# Allegro board single20210120.brd
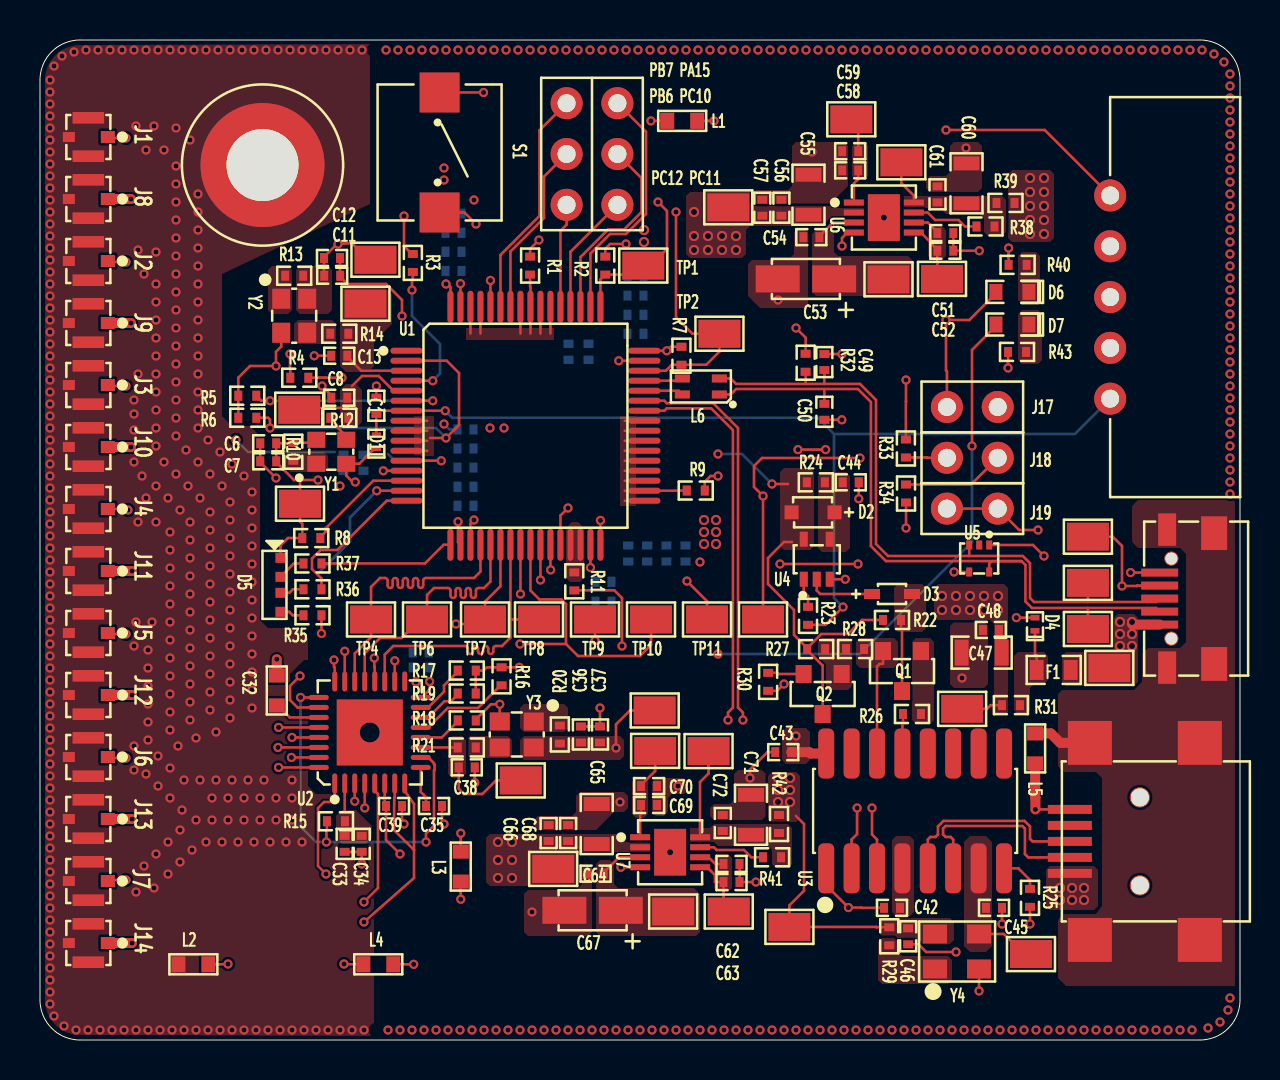
[diagram p0: board, top side]
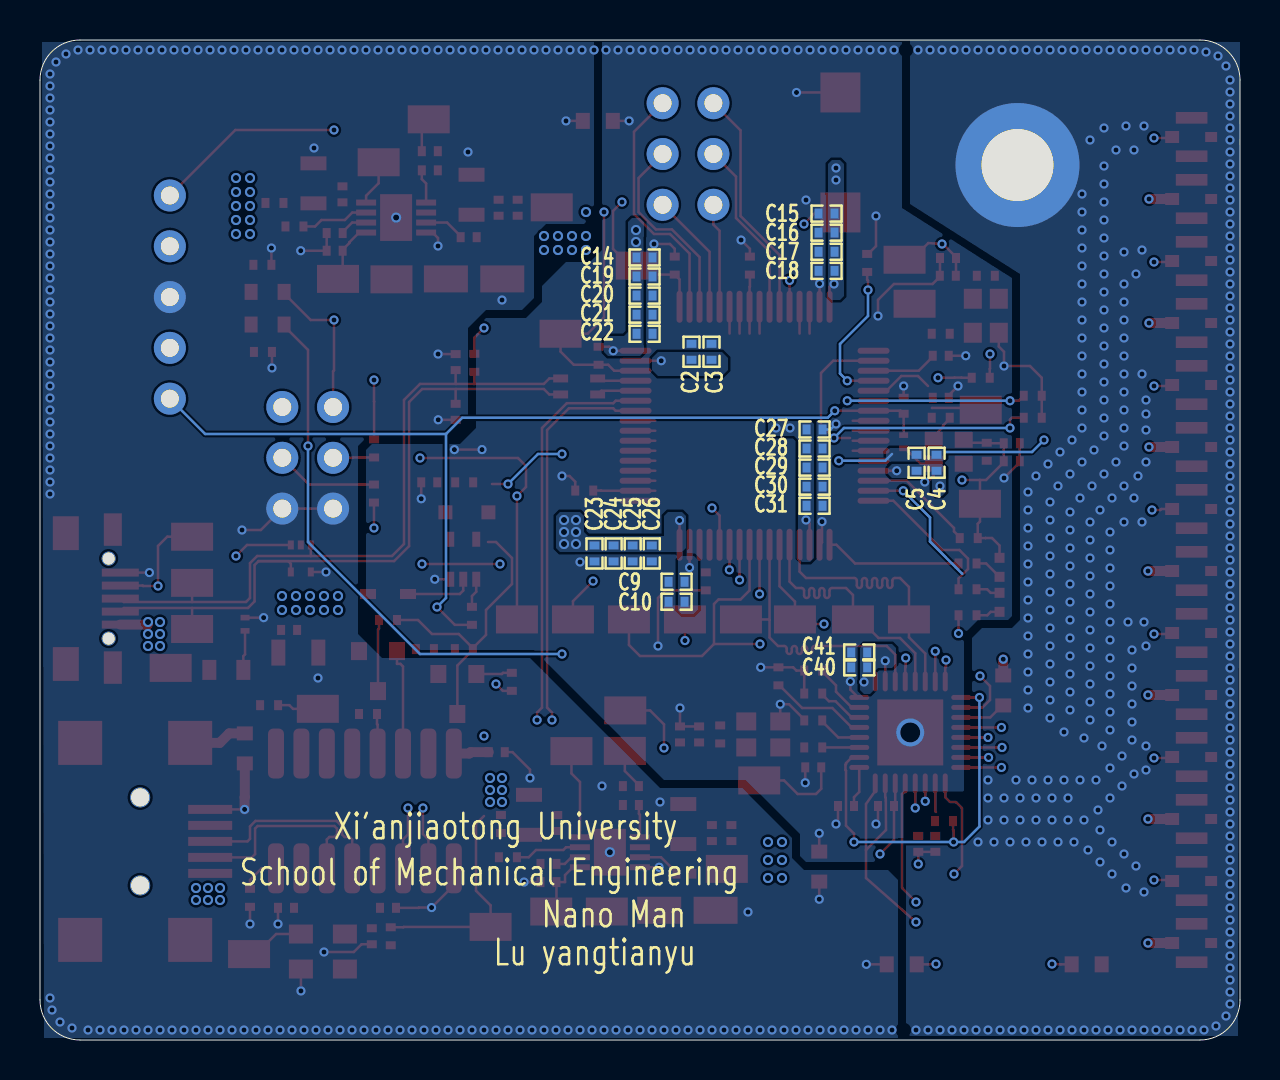
[diagram p1: board, bottom side, seen from below]

Outline 60 x 50 mm; copper layers: TOP, GND, POWER, BOTTOM. Coordinates in mm from the lower left corner of the outline.
Outline path: 0,48 arc(0.59,49.41) 2,50 58,50 arc(59.41,49.41) 60,48 60,2 arc(59.41,0.59) 58,0 2,0 arc(0.59,0.59) 0,2 0,48

## Design rules (mm)
constraint set DEFAULT: min track width 0.127
net group DP1: nets N1282544 N1282560
net group DP2: nets RX TX
net group DP_USB: nets USB_DM USB_DP
nets with their own width: min track width 0.127; nets 5V 5V_USB AGND PC1 PC2 PC3 PC4 PC5 PC6 PC7

## Placement (name value [footprint] x y rotation side)
C1  1uF  [C0402]  16.82 31.71 270 top
C2  2.2uF  [C0402]  27.43 34.41 270 bottom
C3  2.2uF  [C0402]  26.43 34.41 270 bottom
C4  1uF  [C0402]  15.17 28.86 270 bottom
C5  100nF  [C0402]  16.17 28.86 270 bottom
C6  10nF  [C0402]  11.41 29.84 180 top
C7  1uF  [C0402]  11.41 28.94 180 top
C8  10pF  [C0402]  14.96 32.11 0 top
C9  2.2uF  [C0402]  28.17 22.91 0 bottom
C10  2.2uF  [C0402]  28.17 21.91 0 bottom
C11  10nF  [C0402]  14.61 38.21 0 top
C12  1uF  [C0402]  14.6 39.1 0 top
C13  10pF  [C0402]  14.96 34.21 0 top
C14  4.7uF  [C0402]  29.77 39.13 0 bottom
C15  1uF  [C0402]  20.67 41.32 180 bottom
C16  100nF  [C0402]  20.67 40.37 180 bottom
C17  100nF  [C0402]  20.67 39.41 180 bottom
C18  100nF  [C0402]  20.67 38.46 180 bottom
C19  100nF  [C0402]  29.77 38.17 0 bottom
C20  100nF  [C0402]  29.77 37.22 0 bottom
C21  100nF  [C0402]  29.77 36.27 0 bottom
C22  100nF  [C0402]  29.77 35.31 0 bottom
C23  100nF  [C0402]  32.27 24.33 90 bottom
C24  100nF  [C0402]  31.32 24.33 90 bottom
C25  100nF  [C0402]  30.37 24.33 90 bottom
C26  100nF  [C0402]  29.41 24.33 90 bottom
C27  100nF  [C0402]  21.27 30.53 0 bottom
C28  100nF  [C0402]  21.27 29.57 0 bottom
C29  100nF  [C0402]  21.27 28.62 0 bottom
C30  100nF  [C0402]  21.27 27.67 0 bottom
C31  10pF  [C0402]  21.27 26.71 0 bottom
C32  22pF  [C0603]  11.84 17.48 90 top
C33  4.7uF  [C0402]  15.23 9.81 270 top
C34  4.7uF  [C0402]  16.09 9.81 270 top
C35  100nF  [C0402]  19.7 11.7 180 top
C36  10nF  [C0402]  27.05 15.28 90 top
C37  1uF  [C0402]  28 15.28 90 top
C38  10pF  [C0402]  21.34 13.63 180 top
C39  10uF  [C0402]  17.7 11.7 180 top
C40  10uF  [C0402]  19.04 18.63 180 bottom
C41  100pF  [C0402]  19.04 19.38 180 bottom
C42  100nF  [C0402]  42.6 6.61 180 top
C43  100nF  [C0402]  37.16 14.39 0 top
C44  10uF  [C0402]  40.54 27.88 180 top
C45  15pF  [C0402]  47.7 6.61 180 top
C46  100nF  [C0402]  43.41 5.19 270 top
C47  47uF  [C0805]  47.08 19.37 180 top
C48  100nF  [C0402]  47.55 20.5 180 top
C49  10pF  [C0402]  39.22 33.9 270 top
C50  10pF  [C0402]  39.22 31.41 90 top
C51  2.2uF  [C0402]  45.27 40.35 0 top
C52  2.2uF  [C0402]  45.27 39.46 0 top
C53  47uF  [C3216-18]  38.3 38.05 180 top
C54  1uF  [C0402]  38.57 40.14 180 top
C55  47uF  [C0805]  38.42 42.26 90 top
C56  10uF  [C0402]  37.07 41.61 90 top
C57  10nF  [C0402]  36.12 41.61 90 top
C58  2.2uF  [C0402]  40.51 43.48 0 top
C59  10uF  [C0402]  40.51 44.44 0 top
C60  47uF  [C0805]  46.33 42.83 270 top
C61  100nF  [C0402]  44.88 42.28 270 top
C62  2.2uF  [C0402]  34.58 8.8 0 top
C63  2.2uF  [C0402]  34.58 7.9 0 top
C64  1uF  [C0402]  27.78 8.32 180 top
C65  47uF  [C0805]  27.84 10.8 90 top
C66  10nF  [C0402]  25.43 10.35 90 top
C67  47uF  [C3216-18]  27.63 6.49 180 top
C68  10uF  [C0402]  26.41 10.35 90 top
C69  2.2uF  [C0402]  30.45 11.75 180 top
C70  10uF  [C0402]  30.45 12.7 180 top
C71  47uF  [C0805]  35.55 11.26 270 top
C72  100nF  [C0402]  34.14 10.85 270 top
D1  ESD101-B1-02EL  [D0402]  16.82 29.91 90 top
D2  1N4148WS  [SOD_323]  38.65 26.38 180 top
D3  RB521S30  [SOD_523F]  42.6 22.3 0 top
D4  ESD101-B1-02EL  [D0402]  49.75 20.79 90 top
D5  LED_RGB  [LED_RGB_1204]  11.72 22.76 270 top
D6  LED  [D0603]  48.62 37.4 180 top
D7  LED  [D0603]  48.62 35.77 180 top
F1  ASMD0603-050  [F0603]  50.68 18.5 180 top
H1  Hole  [M23R6_6R2]  11.13 43.75 0 top
J1  -  [IPEX4]  2.42 45.15 180 top
J2  -  [IPEX4]  2.42 38.95 180 top
J3  -  [IPEX4]  2.42 32.75 180 top
J4  -  [IPEX4]  2.42 26.55 180 top
J5  -  [IPEX4]  2.42 20.35 180 top
J6  -  [IPEX4]  2.42 14.15 180 top
J7  -  [IPEX4]  2.42 7.95 180 top
J8  -  [IPEX4]  2.42 42.05 180 top
J9  -  [IPEX4]  2.42 35.85 180 top
J10  -  [IPEX4]  2.42 29.65 180 top
J11  -  [IPEX4]  2.42 23.45 180 top
J12  -  [IPEX4]  2.42 17.25 180 top
J13  -  [IPEX4]  2.42 11.05 180 top
J14  -  [IPEX4]  2.42 4.85 180 top
J15  USB_MINI  [MINI_USB]  52.49 9.93 90 top
J16  USB_Micro  [MICRO_USB]  56.81 22.07 90 top
J17  B2S_1  [2P2R54]  46.62 31.65 0 top
J18  B2S_1  [2P2R54]  46.62 29.11 0 top
J19  B2S_1  [2P2R54]  46.62 26.57 0 top
J20  SIP2P54-5P-R  [5P2R54]  53.51 37.15 90 top
J21  -  [3P2R54_2]  27.6 44.3 270 top
L1  0@100MHz  [L0603]  32.11 45.96 0 top
L2  0@100MHz  [L0603]  7.67 3.78 180 top
L3  0@100MHz  [L0603]  21.04 8.67 270 top
L4  0@100MHz  [L0603]  16.91 3.78 180 top
L5  330@100MHz  [L0603]  49.76 14.58 270 top
L6  ACM2012-900  [L2012-2P]  33.04 32.68 180 top
Q1  SS8050  [SOT_23]  43.1 19.45 0 top
Q2  SS8550  [SOT_23]  39.13 18.3 0 top
R1  10k  [R0402]  24.51 38.72 270 top
R2  10k  [R0402]  28.26 38.72 270 top
R3  10k  [R0402]  18.64 38.85 270 top
R4  1k  [R0402]  12.96 33.11 0 top
R5  10k  [R0402]  10.36 32.21 0 top
R6  10k  [R0402]  10.36 31.11 0 top
R7  10k  [R0402]  32.07 34.21 270 top
R8  4.7k  [R0402]  13.56 25.1 0 top
R9  10k  [R0402]  32.79 27.47 180 top
R10  4.7k  [R0402]  12.66 29.41 270 top
R11  10k  [R0402]  26.71 22.93 90 top
R12  10R  [R0402]  14.96 31.11 180 top
R13  4.7k  [R0402]  12.71 38.21 180 top
R14  10R  [R0402]  14.96 35.31 180 top
R15  0R  [R0402]  14.8 10.94 0 top
R16  10k  [R0402]  23.08 18.18 90 top
R17  10k  [R0402]  21.34 18.47 0 top
R18  10k  [R0402]  21.34 15.98 0 top
R19  10k  [R0402]  21.34 17.32 0 top
R20  4.7k  [R0402]  25.99 15.28 90 top
R21  10R  [R0402]  21.34 14.63 0 top
R22  10k  [R0402]  42.6 21 180 top
R23  0R  [R0402]  38.4 21.21 270 top
R24  1M  [R0402]  38.79 27.88 0 top
R25  10k  [R0402]  49.5 7.11 90 top
R26  2.7k  [R0402]  43.6 16.3 0 top
R27  10k  [R0402]  38.81 19.55 0 top
R28  47k  [R0402]  40.75 19.55 180 top
R29  4.7k  [R0402]  42.46 5.19 270 top
R30  1k  [R0402]  36.41 17.91 270 top
R31  10R  [R0402]  48.55 16.74 180 top
R32  4.7k  [R0402]  38.28 33.86 270 top
R33  10k  [R0402]  43.3 29.58 270 top
R34  10k  [R0402]  43.3 27.32 270 top
R35  470  [R0402]  13.62 21.24 0 top
R36  330  [R0402]  13.62 22.54 0 top
R37  100  [R0402]  13.62 23.83 0 top
R38  10k  [R0402]  47.28 40.68 180 top
R39  100R  [R0402]  48.28 41.85 180 top
R40  4.7k  [R0402]  48.88 38.76 0 top
R41  10k  [R0402]  36.6 9.14 180 top
R42  100R  [R0402]  36.95 10.8 270 top
R43  4.7k  [R0402]  48.85 34.4 0 top
S1  TOUCH SWITCH  [6_6_5]  19.98 44.38 270 top
TP1  TEST POINT  [TP0805]  30.16 38.72 0 top
TP2  TEST POINT  [TP0805]  33.97 35.31 0 top
TP3  TEST POINT  [TP0805]  13 26.81 180 top
TP4  TEST POINT  [TP0805]  16.55 21.03 180 top
TP5  TEST POINT  [TP0805]  12.96 31.51 0 top
TP6  TEST POINT  [TP0805]  19.35 21.03 180 top
TP7  TEST POINT  [TP0805]  22.25 21.03 180 top
TP8  TEST POINT  [TP0805]  24.95 21.03 180 top
TP9  TEST POINT  [TP0805]  27.75 21.03 180 top
TP10  TEST POINT  [TP0805]  30.55 21.03 180 top
TP11  TEST POINT  [TP0805]  33.35 21.03 180 top
TP12  TEST POINT  [TP0805]  36.15 21.03 180 top
TP13  TEST POINT  [TP0805]  16.77 39.01 0 top
TP14  TEST POINT  [TP0805]  16.27 36.81 0 top
TP15  TEST POINT  [TP0805]  30.74 16.48 180 top
TP16  TEST POINT  [TP0805]  24.04 12.98 0 top
TP17  TEST POINT  [TP0805]  49.55 4.3 180 top
TP18  TEST POINT  [TP0805]  37.47 5.65 180 top
TP19  TEST POINT  [TP0805]  53.47 18.6 180 top
TP20  TEST POINT  [TP0805]  46.11 16.56 180 top
TP21  TEST POINT  [TP0805]  52.4 20.55 180 top
TP22  TEST POINT  [TP0805]  52.4 22.86 180 top
TP23  TEST POINT  [TP0805]  52.4 25.16 0 top
TP24  TEST POINT  [TP0805]  45.1 38.05 0 top
TP25  TEST POINT  [TP0805]  42.43 38.03 0 top
TP26  TEST POINT  [TP0805]  40.56 46.03 0 top
TP27  TEST POINT  [TP0805]  34.41 41.63 0 top
TP28  TEST POINT  [TP0805]  43.07 43.89 0 top
TP29  TEST POINT  [TP0805]  34.44 6.42 0 top
TP30  TEST POINT  [TP0805]  31.66 6.42 0 top
TP31  TEST POINT  [TP0805]  25.66 8.55 180 top
TP32  TEST POINT  [TP0805]  30.76 14.45 0 top
TP33  TEST POINT  [TP0805]  33.43 14.45 0 top
U1  STM32F405RGT6  [LQFP_64]  24.27 30.71 270 top
U2  PCAP02AE  [QFN_32]  16.49 15.38 0 top
U3  CH340G  [SOP_16]  43.76 11.45 0 top
U4  74HC1G66GW  [SOT_353]  38.84 24.04 0 top
U5  TPD2E001  [SOT_5]  46.96 24.08 180 top
U6  ADM7154-3V3  [LFCSP_8]  42.19 41.12 0 top
U7  ADM7154-3V  [LFCSP_8]  31.51 9.39 0 top
Y1  OSC-8M  [Y2016]  14.56 29.41 0 top
Y2  OSC-32K  [Y2520]  12.71 36.21 270 top
Y3  OSC-4M  [Y2520]  23.84 15.28 180 top
Y4  OSC-12M  [Y3225]  45.85 4.42 0 top

## Library data of the parts
C1-C52 C54-C66 C68-C72 = C NP
C53 C67 = C_T
D1 D4 = ESD101B102ELSE6327XTSA1
D2 = DIODE
D3 = DIODE_SCHTKY_0
D5 = LED_RGB
D6 D7 = LED
F1 = F0603C0R25FWTR
H1 = Hole
J1-J14 = IPEX4
J15 J16 = USB_MINI_AB_RECEPTACLE_1
J17-J19 = B2S_1
J20 = SIP5_2_1
J21 = 3P2R54_2
L1-L5 = INDUCTOR_FERRITE
L6 = Common Mode Choke_ACM2012-900
Q1 = NPN
Q2 = PNP BCE_0
R1-R43 = R
S1 = Touch Switch
TP1-TP33 = TEST POINT
U1 = STM32F405RGT6
U2 = PCAP02AE
U3 = MAX3232EEAE_1
U4 = 74LVC1G125_0
U5 = ESD_TPD2E001
U6 = LDO_ADM7154-3V3
U7 = LDO_ADM7154-3V0
Y1 Y4 = OSC_8M
Y2 Y3 = OSC_32K

## Footprints (pads in the part's own frame, mm; a bottom-side part is the same pattern mirrored in y, then rotated)
2P2R54
  round 1.6 hole 0.9: 1(-1.27,0) 2(1.27,0)
3P2R54_2
  round 1.6 hole 0.9: 1(-2.54,1.27) 2(0,1.27) 3(2.54,1.27) 4(2.54,-1.27) 5(0,-1.27) 6(-2.54,-1.27)
5P2R54
  round 1.6 hole 0.9: 1(-5.08,0) 2(-2.54,0) 3(0,0) 4(2.54,0) 5(5.08,0)
6_6_5
  rect 2x2 smd: 1(-3,0) 2(3,0)
C0402
  rect 0.4x0.5 smd: 1(-0.4,0) 2(0.4,0)
C0603
  rect 0.7x0.8 smd: 1(-0.75,0) 2(0.75,0)
C0805
  rect 0.7x1.3 smd: 1(-1,0) 2(1,0)
C3216-18
  rect 2.2x1.35 smd: 1(-1.41,0) 2(1.41,0)
D0402
  rect 0.28x0.45 smd: 1(-0.33,0) 2(0.33,0)
D0603
  rect 0.65x0.8 smd: 1(-0.825,0) 2(0.825,0)
F0603
  rect 0.7x1 smd: 1(-0.85,0) 2(0.85,0)
IPEX4
  rect 0.7x0.6 smd: 1(-0.975,0)
  rect 1.58x0.58 smd: 2(0,-0.96) 4(0,0.96)
  rect 0.6x0.5 smd: 3(0.975,0)
L0603
  rect 0.7x0.8 smd: 1(-0.75,0) 2(0.75,0)
L2012-2P
  rect 0.75x0.4 smd: 1(-0.925,0.4) 2(-0.925,-0.4) 3(0.925,-0.4) 4(0.925,0.4)
LED_RGB_1204
  rect 0.5x0.5 smd: 1(-0.4,0.3) 2(0.4,0.3) 3(-1.35,0.3) 4(1.35,0.3)
LFCSP_8
  rect 1x0.3 smd: 1(-1.5,0.75) 2(-1.5,0.25) 3(-1.5,-0.25) 4(-1.5,-0.75) 5(1.5,-0.75) 6(1.5,-0.25) 7(1.5,0.25) 8(1.5,0.75)
  rect 1.6x2.34 smd: 9(0,0)
LQFP_64
  oval 0.3x1.6 smd: 1(-3.75,-5.95) 2(-3.25,-5.95) 3(-2.75,-5.95) 4(-2.25,-5.95) 5(-1.75,-5.95) 6(-1.25,-5.95) 7(-0.75,-5.95) 8(-0.25,-5.95) 9(0.25,-5.95) 10(0.75,-5.95) 11(1.25,-5.95) 12(1.75,-5.95) 13(2.25,-5.95) 14(2.75,-5.95) 15(3.25,-5.95) 16(3.75,-5.95) 33(3.75,5.95) 34(3.25,5.95) 35(2.75,5.95) 36(2.25,5.95) 37(1.75,5.95) 38(1.25,5.95) 39(0.75,5.95) 40(0.25,5.95) 41(-0.25,5.95) 42(-0.75,5.95) 43(-1.25,5.95) 44(-1.75,5.95) 45(-2.25,5.95) 46(-2.75,5.95) 47(-3.25,5.95) 48(-3.75,5.95)
  oval 1.6x0.3 smd: 17(5.95,-3.75) 18(5.95,-3.25) 19(5.95,-2.75) 20(5.95,-2.25) 21(5.95,-1.75) 22(5.95,-1.25) 23(5.95,-0.75) 24(5.95,-0.25) 25(5.95,0.25) 26(5.95,0.75) 27(5.95,1.25) 28(5.95,1.75) 29(5.95,2.25) 30(5.95,2.75) 31(5.95,3.25) 32(5.95,3.75) 49(-5.95,3.75) 50(-5.95,3.25) 51(-5.95,2.75) 52(-5.95,2.25) 53(-5.95,1.75) 54(-5.95,1.25) 55(-5.95,0.75) 56(-5.95,0.25) 57(-5.95,-0.25) 58(-5.95,-0.75) 59(-5.95,-1.25) 60(-5.95,-1.75) 61(-5.95,-2.25) 62(-5.95,-2.75) 63(-5.95,-3.25) 64(-5.95,-3.75)
M23R6_6R2
  round 6.2 hole 3.6: 1(0,0)
MICRO_USB
  round 0.7 hole 0.6 unplated: (-2,0.24) (2,0.24)
  rect 0.4x1.85 smd: 1(-1.3,0.825) 2(-0.65,0.825) 3(0,0.825) 4(0.65,0.825) 5(1.3,0.825)
  rect 1.69x1.3 smd: 6(-3.27,-1.9) 8(3.27,-1.9)
  rect 1.625x0.9 smd: 7(-3.45,0.45) 9(3.45,0.45)
MINI_USB
  round 1 hole 0.9 unplated: (-2.2,-2.5) (2.2,-2.5)
  rect 0.45x2.2 smd: 1(-1.6,1) 2(-0.8,1) 3(0,1) 4(0.8,1) 5(1.6,1)
  rect 2.2x2.2 smd: 6(-4.925,-5.5) 7(-4.925,0) 8(4.925,-5.5) 9(4.925,0)
QFN_32
  oval 0.25x1 smd: 1(-1.75,-2.55) 2(-1.25,-2.55) 3(-0.75,-2.55) 4(-0.25,-2.55) 5(0.25,-2.55) 6(0.75,-2.55) 7(1.25,-2.55) 8(1.75,-2.55) 17(1.75,2.55) 18(1.25,2.55) 19(0.75,2.55) 20(0.25,2.55) 21(-0.25,2.55) 22(-0.75,2.55) 23(-1.25,2.55) 24(-1.75,2.55)
  oval 1x0.25 smd: 9(2.55,-1.75) 10(2.55,-1.25) 11(2.55,-0.75) 12(2.55,-0.25) 13(2.55,0.25) 14(2.55,0.75) 15(2.55,1.25) 16(2.55,1.75) 25(-2.55,1.75) 26(-2.55,1.25) 27(-2.55,0.75) 28(-2.55,0.25) 29(-2.55,-0.25) 30(-2.55,-0.75) 31(-2.55,-1.25) 32(-2.55,-1.75)
  rect 3.3x3.3 smd: 33(0,0)
R0402
  rect 0.4x0.5 smd: 1(-0.45,0) 2(0.45,0)
SOD_323
  rect 0.7x0.7 smd: 1(-1.075,0) 2(1.075,0)
SOD_523F
  rect 0.8x0.5 smd: 1(-1,0) 2(1,0)
SOP_16
  rrect 0.8x2.5 smd: 1(-4.445,-2.87) 2(-3.175,-2.87) 3(-1.905,-2.87) 4(-0.635,-2.87) 5(0.635,-2.87) 6(1.905,-2.87) 7(3.175,-2.87) 8(4.445,-2.87) 9(4.445,2.87) 10(3.175,2.87) 11(1.905,2.87) 12(0.635,2.87) 13(-0.635,2.87) 14(-1.905,2.87) 15(-3.175,2.87) 16(-4.445,2.87)
SOT_5
  rect 0.3x0.45 smd: 1(-0.5,-0.675) 2(0,-0.675) 3(0.5,-0.675) 4(0.5,0.675) 5(-0.5,0.675)
SOT_23
  rect 0.8x0.9 smd: 1(0.95,0) 2(-0.95,0) 3(0,-2)
SOT_353
  rect 0.4x0.75 smd: 1(-0.65,-1) 2(0,-1) 3(0.65,-1) 4(0.65,1) 5(-0.65,1)
TP0805
  rect 2.1x1.4 smd: 1(0,0)
Y2016
  rect 0.9x0.8 smd: 1(-0.75,-0.6) 2(0.75,-0.6) 3(0.75,0.6) 4(-0.75,0.6)
Y2520
  rect 1x0.9 smd: 1(-0.85,-0.65) 2(0.85,-0.65) 3(0.85,0.65) 4(-0.85,0.65)
Y3225
  rect 1.2x0.95 smd: 1(-1.1,-0.875) 2(1.1,-0.875) 3(1.1,0.875) 4(-1.1,0.875)

## Nets
3V: C36.1 C37.1 C39.2 C40.2 C41.2 C65.1 C66.1 C68.1 D7.2 R20.1 TP15.1 TP31.1 U2.6 U2.18 U7.2 Y3.4(VCC)
3V3: C4.2 C5.2 C6.1 C7.1 C11.1 C12.1 C14.2 C15.2 C16.2 C17.2 C18.2 C19.2 C20.2 C21.2 C22.2 C23.2 C24.2 C25.2 C26.2 C27.2 C28.2 C29.2 C30.2 C31.2 C55.1 C56.1 C57.1 D2.2(K) D5.3 D6.2 J17.1 J17.2 J20.5 Q2.3 R4.1 R7.1 R8.1 R10.1 R13.1 R22.2 R24.1 R27.1 R32.1 TP3.1 TP13.1 TP27.1 U1.13 U1.19 U1.32 U1.48 U1.64 U4.5 U6.2 Y1.4(VCC) Y2.4(VCC)
5V: C43.2 C46.1 C47.1 C48.1 R29.1 R31.2 R39.1 R42.1 TP18.1 TP20.1 U3.16 Y4.4(VCC)
5V_USB: F1.1 J15.1 J16.1 TP19.1 U5.1(VCC)
AGND: C4.1 C5.1 C32.2 J8.1 J9.1 J10.1 J11.1 J12.1 J13.1 J14.1 L2.1 L4.2 U1.12 U2.5 U2.7 U2.8 U2.26
DGND: C1.1 C2.1 C3.1 C6.2 C7.2 C8.1 C9.2 C10.2 C11.2 C12.2 C13.1 C14.1 C15.1 C16.1 C17.1 C18.1 C19.1 C20.1 C21.1 C22.1 C23.1 C24.1 C25.1 C26.1 C27.1 C28.1 C29.1 C30.1 C31.1 C33.2 C34.2 C35.1 C36.2 C37.2 C38.1 C39.1 C40.1 C41.1 C44.1 D1.1 L1.1 L3.1 R1.1 R2.1 R3.1 R5.1 R6.1 R9.1 R11.1 R16.2 R17.2 R18.2 R19.2 S1.1 U1.18 U1.63(VSS_4) U2.16 U2.33 U4.3 Y1.2 Y2.2 Y3.2
PGND: C42.2 C43.1 C45.1 C46.2 C47.2 C48.2 C49.1 C50.1 C51.2 C52.2 C53.2 C54.2 C55.2 C56.2 C57.2 C58.1 C59.1 C60.1 C61.1 C62.2 C63.2 C64.2 C65.2 C66.2 C67.2 C68.2 C69.1 C70.1 C71.1 C72.1 D4.2 J15.5 J16.5 J19.1 J19.2 J20.3 L1.2 L3.2 L4.1 L5.2 R25.1 R40.1 R43.1 U3.1 U5.4 U6.4 U6.9 U7.4 U7.9 Y4.2
VDD18: R15.1 U2.10 U2.25
BOOT0: R30.2 R33.1 U1.60
BOOT1: R34.2 TP12.1 U1.28
CDC_CLK: TP6.1 U1.21 U2.21
CDC_MISO: TP7.1 U1.22 U2.23
CDC_MOSI: TP8.1 U1.23 U2.19
CDC_NSS: TP4.1 U1.20 U2.22
DTR: R26.1 U3.13
IIC_EN: TP11.1 U1.27 U2.24
INTN: TP10.1 U1.25 U2.20
IO1: J21.1(6) U1.50
IO2: J21.2 U1.51
IO3: J21.3 U1.52
IO4: J21.4 U1.53
IO5: J21.5 U1.58
IO6: J21.6 U1.59
OSC32_IN: C13.2 R14.1 TP14.1 U1.3
OSC_CDC_IN: C38.2 R21.1 TP16.1 U2.11
OSC_IN: C8.2 R12.1 TP5.1 U1.5
PA1: R35.2 U1.15
PA2: R36.2 U1.16
PA3: R37.2 U1.17
PC1: J1.1 U2.28
PC2: J2.1 U2.29
PC3: J3.1 U2.30
PC4: J4.1 U2.31
PC5: J5.1 U2.32
PC6: J6.1 U2.3
PC7: J7.1 U2.4
PG3: TP9.1 U1.24 U2.1
RESET: C1.2 D1.2 J20.1 R4.2 R23.2 S1.2 U1.7
RTS: Q1.2(EMITTER) R28.1 U3.14
RX: U1.43 U3.2
SWCLK: J20.2 R2.2 TP1.1 U1.49
SWDIO: J20.4(TMS) R7.2 TP2.1 U1.46
TX: U1.42 U3.3
USB_DM: L6.4 U1.44
USB_DP: L6.3 U1.45
USB_ID: J16.4 TP23.1 U1.26
USB_SH: J15.6 J15.7 J15.8 J15.9(SHLD4) J16.6 J16.7 J16.8 J16.9(SHLD4) L5.1
N02715: C2.2 C3.2 U1.47
N26347: R14.2 Y2.3
N29089: R12.2 Y1.3
N51136: C49.2 J16.3 L6.2 R32.2 TP22.1 U5.3
N51143: C50.2 J16.2 L6.1 TP21.1 U5.5
N60341: C53.1 C54.1 TP25.1 U6.3
N60528: C51.1 C52.1 TP24.1 U6.5 U6.6
N60691: C58.2 C59.2 TP26.1 U6.1(VREG)
N73371: C62.1 C63.1 TP29.1 U7.5 U7.6
N73413: C64.1 C67.1 TP30.1 U7.3
N73497: C69.2 C70.2 TP32.1 U7.1(VREG)
N79129: R21.2 Y3.3
N79731: C33.1 C34.1 R15.2 U2.2
N460116: R38.2 U6.7
N460149: C60.2 C61.2 R38.1 R39.2 TP28.1 U6.8
N460345: R41.2 U7.7
N460349: C71.2 C72.2 R41.1 R42.2 TP33.1 U7.8
N505208: D6.1(CATHODE) R40.2
N505467: D7.1(CATHODE) R43.2
N521157: D4.1 F1.2 R31.1
N584999: C9.1 C10.1 U1.31
N596448: R9.2 U1.33 U1.34 U1.35 U1.36 U1.37 U1.38 U1.39 U1.40 U1.41
N899054: R6.2 U1.2 U1.8 U1.9 U1.10 U1.11
N902106: R8.2 U1.14
N910178: R11.2 U1.29 U1.30
N910776: R10.2 Y1.1
N911543: R13.2 Y2.1
N916741: R1.2 U1.54 U1.55 U1.56 U1.57 U1.61 U1.62
N918072: R20.2 Y3.1
N919223: R16.1 U2.13
N919295: R19.1 U2.14
N919351: R17.1 U2.15
N919833: R18.1 U2.12
N923492: C35.2 U2.9
N1282488: C42.1 U3.4
N1282544: J15.3 U3.5
N1282560: J15.2 U3.6
N1283076: R29.2 Y4.1
N1283256: C45.2 TP17.1 U3.7 Y4.3
N1285259: R25.2 U3.8(XO)
N1298012: R23.1 U4.1
N1298019: D3.1 U4.2(Z)
N1298208: C44.2 D2.1 R24.2 U4.4
N1298582: D3.2 Q1.3 R22.1
N1298589: Q1.1 R26.2
N1298727: Q2.1 R27.2 R28.2
N1298896: Q2.2(E) R30.1
N1310957: J18.1 R33.2
N1310961: J18.2 R34.1
N1315376: D5.4(R) R35.1
N1315380: D5.2 R36.1
N1315384: D5.1 R37.1
N1323457: C32.1 U2.27
N1326027: H1.1 J1.2 J1.3 J1.4 J2.2 J2.3 J2.4 J3.2 J3.3 J3.4 J4.2 J4.3 J4.4 J5.2 J5.3 J5.4 J6.2 J6.3 J6.4 J7.2 J7.3 J7.4 J8.2 J8.3 J8.4 J9.2 J9.3 J9.4 J10.2 J10.3 J10.4 J11.2 J11.3 J11.4 J12.2 J12.3 J12.4 J13.2 J13.3 J13.4 J14.2 J14.3 J14.4 L2.2
N1367719: R3.2 U1.4
N1367723: R5.2 U1.6

Pads without a net: J15 4; U1 1; U2 17; U3 9 10 11 12 15; U5 2

## Via types
v1: diameter 0.457, hole 0.254, TOP to BOTTOM, 662 vias
v2: diameter 0.508, hole 0.305, TOP to BOTTOM, 63 vias
v3: diameter 1.4, hole 1, TOP to BOTTOM, 1 via

## Routing (per net, layer and track width the routed paths; a pad name or vN(x,y) marks a point on that pad's centre or on a via; arc(x,y) is an arc through that point)
3V: length 34.7
  TOP w0.127: TP15.1 29.5,16.48 28.8,15.78 v1(28.8,14.6) ; v1(18,9.3) 17.3,10 C39.2 17.24,11.76 U2.6 ; v1(46.6,29.7) 46.6,34.5 47.8,35.7 D7.2 ; U2.18 v1(17.74,18.96)
  BOTTOM w0.127: v1(33.9,19.3) 41,19.3 46.6,24.9 v1(46.6,29.7)
  vias: v1(18.8,17.9) v2(22.9,9.9) v2(22.9,9) v2(22.9,8.1) v2(23.6,9.9) v2(23.6,9) v2(23.6,8.1)
3V3: length 62.6
  TOP w0.127: J20.5 50.23,45.5 v1(45.3,45.5) ; v1(37.8,35.6) 38.28,35.12 R32.1 ; R7.1 31.54,34.66 v1(31.34,34.46) U1.48 ; U1.19 21.52,25.82 v1(21.7,26) ; R22.2 41.1,21 40.4,20.3 39.06,20.3 38.36,19.6 ; 13,28 12.7,28 11.81,28.89 C7.1 C6.1 12.64,29.84 R10.1 13.66,29.86 Y1.4 ; 13,28 v1(13.9,28) ; 13,28 13,28 TP3.1 13,25.92 13.11,25.81 R8.1 12.72,25.1 12.72,25.1 12.4,25.1 12.02,24.72 D5.3 ; U1.32 v1(28.02,25.98) ; 38.36,19.6 37.7,20.25 37.7,21.5 36.4,22.8 36.4,24.1 37.2,24.9 37.6,24.9 ; 38.36,19.6 R27.1 38.36,19.5 39.13,18.72 Q2.3 ; J17.1 45.35,33.43 45.3,33.48 v1(45.3,36) 46.47,36 47.8,37.33 D6.2 ; v1(36.6,27.8) 37.4,27.8 ; R4.1 12.51,33.55 12.5,33.57 v1(12.5,34.3) ; TP13.1 16.42,39.01 15.59,39.85 v1(14.9,39.8) 14.8,39.7 14.75,39.7 14.2,39.15 C12.1 14.2,38.22 C11.1 ; U1.64 20.52,37.65 20.37,37.8 v1(20.3,37.8) ; U1.13 v1(17.17,28.46)
  POWER w0.127: J17.1 J17.2
  BOTTOM w0.127: v1(36.6,27.8) 35.1,29.3 v1(33.9,29.3) ; 15.12,28.46 C4.2
  vias: v1(15,27.7) v1(20.2,43.6) v1(20.2,43) v1(22.5,30.6) v1(23.2,30.6) v2(30.2,40.5) v2(30.2,39.9) v2(32.7,41.4) v2(32.7,40.2) v2(32.7,39.5) v2(33.2,26) v2(33.2,25.4) v2(33.2,24.8) v2(33.4,40.2) v2(33.4,39.5) v2(33.8,26) v2(33.8,25.4) v2(33.8,24.8) v2(34.1,40.2) v2(34.1,39.5) v2(34.8,40.2) v2(34.8,39.5)
5V: length 14.9
  TOP w0.127: R31.2 47.53,16.74 47.35,16.56 TP20.1 ; 37.8,11.2 38.2,10.8 38.2,7.46 37.47,6.73 TP18.1 41.82,5.65 41.84,5.64 R29.1
  TOP w0.5: C43.2 38.47,14.39 38.53,14.32 U3.16
  vias: v1(37.8,15.2) v2(36.9,13.1) v2(36.9,12.5) v2(36.9,11.9) v2(37.5,13.1) v2(37.5,12.5) v2(37.5,11.9) v2(45.1,22.2) v2(45.1,21.5) v2(45.8,22.2) v2(45.8,21.5) v2(46.5,22.2) v2(46.5,21.5) v2(47.2,22.2) v2(47.2,21.5) v2(47.9,22.2) v2(47.9,21.5) v2(49.5,43.1) v2(49.5,42.4) v2(49.5,41.7) v2(49.5,41) v2(49.5,40.3) v2(50.2,43.1) v2(50.2,42.4) v2(50.2,41.7) v2(50.2,41) v2(50.2,40.3)
5V_USB: length 4.4
  TOP w0.127: v1(50.2,24.2) 49.65,24.75 47.46,24.75
  TOP w0.5: 54.6,20.8 54.63,20.77 J16.1
  vias: v2(51,7.6) v2(51,7) v2(51.6,7.6) v2(51.6,7) v2(52.2,7.6) v2(52.2,7) v2(54,20.9) v2(54,20.3) v2(54,19.7) v2(54.6,20.9) v2(54.6,20.3) v2(54.6,19.7)
AGND: length 50
  TOP w0.127: v1(13,18.2) 12.5,17.7 12.5,17 12.87,16.63 U2.26 ; 18.7,9.5 17.7,10.5 17.71,11.95 17.71,12.11 17.74,12.14 U2.7 ; 18.7,9.5 18.7,8.1 v1(16.2,5.9) ; 18.7,9.5 18.7,11.8 18.24,12.45 U2.8 ; U2.5 16.74,12.46 16.9,12.3 16.9,7.6 v1(16.2,6.9) ; L2.1 8.96,3.78 v1(9.4,3.8) ; U1.12 v1(20.06,28.96) ; v1(15.2,3.8) 15.62,3.78 L4.2
  TOP w0.5: J12.1 v1(4.6,17.25) ; J10.1 v1(4.55,29.65) ; J13.1 v1(4.6,11.05) ; J8.1 v1(4.55,42.05) ; J9.1 v1(4.55,35.85) ; J14.1 v1(4.6,4.85) ; C32.2 v1(11.84,19.04) ; J11.1 v1(4.6,23.45)
  GND w0.127: 11.2,20.3 11.02,20.48 11.02,28.08 10.9,28.2
  BOTTOM w0.127: 14.73,29.4 10.4,29.4 v1(9.8,30) ; v1(20.06,28.96) 17.74,28.96 17.4,29.3
DGND: length 53.7
  TOP w0.127: C35.1 20.1,10.9 v1(20.2,10.8) ; v1(18.2,10.8) 18.1,10.9 C39.1 ; C36.2 C37.2 v1(28,16.6) ; v1(18.1,36.2) 18.1,37 17.3,37.8 15.37,37.8 15.01,38.16 C11.2 15,38.22 C12.2 ; Y2.2 12.06,34.67 11.8,34.41 v1(11.8,33.7) 10.5,33.7 9.91,33.11 R5.1 R6.1 ; C44.1 v1(40.94,27.06) ; Y3.2 v1(22.99,16.79) 22.55,16.79 21.79,16.03 R18.2 ; U1.63 v1(21.02,37.82) ; U1.18 20.9,24.88 v1(20.9,25.92) ; v1(11.8,28.1) 11.01,28.89 C7.2 C6.2 ; R9.1 33.24,27.91 33.53,28.2 v1(33.9,28.2) ; v1(24.95,40) 24.51,39.56 R1.1 ; U2.16 19.09,17.13 19.48,17.52 v1(19.48,17.93) ; C1.1 v1(16.82,32.7) ; v1(14.1,32.7) 14.56,32.24 C8.1 ; R19.2 R17.2 22.18,18.47 22.34,18.63 R16.2 v1(23.97,18.63) ; v1(29.1,19.7) 29.1,22.1 28.72,22.48 R11.1 ; v1(15.76,27.9) 15.64,27.9 15.31,28.22 Y1.2 15.96,28.81 16.73,29.58 D1.1 ; C13.1 v1(13.71,34.21) ; R3.1 18.59,39.3 18.2,39.69 v1(18.2,41.2) ; L3.1 v1(21.04,10.34) ; C38.1 v1(21.74,12.86) ; C33.2 C34.2 v1(16.09,8.8) ; U4.3 v1(40.26,23.04) ; v1(29.3,39.8) 28.5,39.8 28.26,39.56 R2.1 ; v1(39.28,29.52) v1(37.9,29.52) ; S1.1 v1(22.18,47.38) ; L1.1 v1(30.54,45.96)
  GND w0.127: 17.4,9.4 16.8,8.8 v1(16.09,8.8)
  BOTTOM w0.127: C27.1 20.47,30.53 v1(20.2,30.8)
  vias: v1(17.3,49.5) v1(17.9,49.5) v1(18.5,49.5) v1(19.1,49.5) v1(19.7,49.5) v1(20.3,49.5) v1(20.9,49.5) v1(21.5,49.5) v1(21.7,42) v1(22.1,49.5) v1(22.7,49.5) v1(23.3,49.5) v1(23.9,49.5) v1(24.5,49.5) v1(25.1,49.5) v1(25.7,49.5) v1(26.3,49.5) v1(26.9,49.5) v1(27.5,49.5) v1(28.1,49.5) v1(28.7,49.5) v1(29.3,49.5) v1(29.9,49.5) v1(30.5,49.5) v1(31.1,49.5) v1(31.7,49.5) v1(33,23.9) v3(16.49,15.38)
PGND: length 35.8
  TOP w0.127: C62.2 C63.2 v1(35.8,7.9) ; R43.1 v1(48.4,33.6) ; U7.4 v1(29.04,8.64) ; C42.2 41.07,6.61 41.06,6.62 v1(40.42,6.62) 39.31,7.73 U3.1 ; U5.4 v1(45.7,23.4) ; Y4.2 v1(46.95,2.45) ; C50.1 v1(40.09,31.01) ; L3.2 v1(21.04,7.04) ; J16.5 v1(54.53,23.37) ; v1(45.8,4.4) 44.31,4.4 43.92,4.79 C46.2 ; v1(35.5,13.1) 35.5,13.52 36.37,14.39 C43.1 ; L1.2 v1(33.7,45.96) ; U6.4 40.37,40.37 40.1,40.1 v1(40.1,39.7) ; L4.1 v1(18.68,3.78) ; v1(46.96,39.46) C52.2 C51.2 ; J15.5 v1(49.77,11.53) ; D4.2 v1(48.82,21.12) ; v1(49.9,25.5) 48.96,25.5 J19.2 J19.1 ; R25.1 v1(49.5,5.8) ; R40.1 v1(48.43,39.6) ; C49.1 v1(40.1,34.3) ; C45.1 v1(48.1,5.8)
  TOP w0.5: L5.2 49.76,12.15 49.77,12.14 v1(49.77,11.53)
  vias: v1(17.4,0.5) v1(18,0.5) v1(18.6,0.5) v1(19.2,0.5) v1(19.8,0.5) v1(20.4,0.5) v1(21,0.5) v1(21.6,0.5) v1(22.2,0.5) v1(22.8,0.5) v1(23.4,0.5) v1(24,0.5) v1(24.6,6.4) v1(24.6,0.5) v1(25.2,0.5) v1(25.8,0.5) v1(26.4,0.5) v1(27,0.5) v1(27.6,0.5) v1(28.2,0.5) v1(28.8,0.5) v1(29,11.9) v1(29.4,0.5) v1(30,0.5) v1(30.6,0.5) v1(31.2,0.5) v1(31.8,0.5) v1(31.9,12.7) v1(32.3,49.5) v1(32.4,0.5) v1(32.9,49.5) v1(33,0.5) v1(33.5,49.5) v1(33.6,0.5) v1(34.1,49.5) v1(34.2,0.5) v1(34.7,49.5) v1(34.8,0.5) v1(35.3,49.5) v1(35.4,0.5) v1(35.9,49.5) v1(36,0.5) v1(36.5,49.5) v1(36.6,0.5) v1(36.9,37) v1(37.1,49.5) v1(37.2,0.5) v1(37.7,49.5) v1(37.8,0.5) v1(38.3,49.5) v1(38.4,0.5) v1(38.6,44.4) v1(38.9,49.5) v1(39,0.5) v1(39.5,49.5) v1(39.6,0.5) v1(40.1,49.5) v1(40.2,0.5) v1(40.7,49.5) v1(40.8,0.5) v1(41.3,49.5) v1(41.4,0.5) v1(41.9,49.5) v1(42,0.5) v1(42.5,49.5) v1(42.6,0.5) v1(43.1,49.5) v1(43.2,0.5) v1(43.7,49.5) v1(43.8,0.5) v1(44.3,49.5) v1(44.4,0.5) v1(44.9,49.5) v1(45,0.5) v1(45.5,49.5) v1(45.6,0.5) v1(46.1,49.5) v1(46.1,18.1) v1(46.2,0.5) v1(46.3,44.6) v1(46.7,49.5) v1(46.8,0.5) v1(47.3,49.5) v1(47.4,0.5) v1(47.9,49.5) v1(48,0.5) v1(48.5,49.5) v1(48.6,0.5) v1(49.1,49.5) v1(49.2,0.5) v1(49.7,49.5) v1(49.8,0.5) v1(50.3,49.5) v1(50.4,0.5) v1(50.9,49.5) v1(51,0.5) v1(51.5,49.5) v1(51.6,0.5) v1(52.1,49.5) v1(52.2,0.5) v1(52.7,49.5) v1(52.8,0.5) v1(53.3,49.5) v1(53.4,0.5) v1(53.9,49.5) v1(54,0.5) v1(54.5,49.5) v1(54.6,0.5) v1(55.1,49.5) v1(55.2,0.5) v1(55.7,49.5) v1(55.8,0.5) v1(56.3,49.5) v1(56.4,0.5) v1(56.9,49.5) v1(57,0.5) v1(57.5,49.5) v1(57.6,0.5) v1(58.1,49.5) v1(58.4,0.6) v1(58.7,49.3) v1(59,0.9) v1(59.2,48.9) v1(59.4,1.5) v1(59.5,48.3) v1(59.5,47.7) v1(59.5,47.1) v1(59.5,46.5) v1(59.5,45.9) v1(59.5,45.3) v1(59.5,44.7) v1(59.5,44.1) v1(59.5,43.5) v1(59.5,42.9) v1(59.5,42.3) v1(59.5,41.7) v1(59.5,41.1) v1(59.5,40.5) v1(59.5,39.9) v1(59.5,39.3) v1(59.5,38.7) v1(59.5,38.1) v1(59.5,37.5) v1(59.5,36.9) v1(59.5,36.3) v1(59.5,35.7) v1(59.5,35.1) v1(59.5,34.5) v1(59.5,33.9) v1(59.5,33.3) v1(59.5,32.7) v1(59.5,32.1) v1(59.5,31.5) v1(59.5,30.9) v1(59.5,30.3) v1(59.5,29.7) v1(59.5,29.1) v1(59.5,28.5) v1(59.5,27.9) v1(59.5,27.3) v1(59.5,2.1) v2(31.51,9.39) v2(42.19,41.12)
VDD18: length 19.9
  TOP w0.127: v1(14.32,9.9) 14.32,10.47 14.35,10.5 R15.1 ; v1(19.3,9.9) 19.3,10.32 19.7,10.72 19.7,13.47 19.73,13.5 19.73,13.76 19.7,13.79 19.7,13.84 19.41,14.13 U2.10 ; U2.25 v1(13.03,17.13)
  BOTTOM w0.127: v1(13.03,17.13) 13.03,10.67 13.8,9.9 v1(14.32,9.9) v1(19.3,9.9)
BOOT0: length 49.7
  TOP w0.127: R33.1 43.3,31.92 43.3,31.93 v1(43.3,33) ; v1(37.2,17.8) 36.86,17.46 R30.2 ; U1.60 v1(22.52,37.98)
  GND w0.127: v1(22.52,37.98) 23.34,38.8 33.6,38.8 35.9,36.5 38.6,36.5 ; 38.6,36.5 38.6,19.2 v1(37.2,17.8) ; 38.6,36.5 42.6,36.5 43.3,35.8 v1(43.3,33)
BOOT1: length 31.7
  TOP w0.127: v1(26.4,26.6) 26.02,26.22 U1.28 ; v1(43.3,25.6) R34.2 ; v1(41,29.1) 36.1,29.1 35.7,28.7 35.7,27.65 v1(36.15,27.2) TP12.1
  GND w0.127: v1(41,29.1) 42.1,29.1 42.5,28.7 42.5,26.4 v1(43.3,25.6) ; v1(36.15,27.2) 35.55,26.6 v1(26.4,26.6)
CDC_CLK: length 14.1
  TOP w0.127: U2.21 16.24,19.34 17,20.1 18.07,20.1 19,21.03 TP6.1 19.35,22.25 19.7,22.6 20.4,22.6 arc(20.49,22.56) 20.53,22.47 20.53,22.23 arc(20.65,22.1) 20.78,22.23 20.78,22.47 arc(20.91,22.6) 21.03,22.47 21.03,22.23 arc(21.16,22.1) 21.29,22.23 21.29,22.47 arc(21.42,22.6) 21.54,22.47 21.54,22.23 arc(21.67,22.1) 21.8,22.23 21.8,22.47 arc(21.83,22.56) 21.92,22.6 22.2,22.6 22.52,22.92 U1.21
CDC_MISO: length 14.8
  TOP w0.127: v1(20.8,20.8) 22.02,20.8 TP7.1 22.25,21.92 23.02,22.69 U1.22 ; U2.23 v1(15.24,19.44)
  GND w0.127: v1(20.8,20.8) 19.09,20.8 arc(19.02,20.83) 18.99,20.9 arc(18.96,20.97) 18.89,21 18.84,21 arc(18.77,20.97) 18.74,20.9 arc(18.71,20.83) 18.64,20.8 18.59,20.8 arc(18.52,20.83) 18.49,20.9 arc(18.46,20.97) 18.39,21 18.33,21 arc(18.26,20.97) 18.23,20.9 arc(18.2,20.83) 18.13,20.8 18.08,20.8 arc(18.01,20.83) 17.98,20.9 arc(17.95,20.97) 17.88,21 17.82,21 arc(17.75,20.97) 17.72,20.9 arc(17.69,20.83) 17.62,20.8 17.57,20.8 arc(17.5,20.83) 17.47,20.9 arc(17.44,20.97) 17.37,21 17.32,21 arc(17.25,20.97) 17.22,20.9 arc(17.19,20.83) 17.12,20.8 17.06,20.8 arc(16.99,20.83) 16.96,20.9 arc(16.93,20.97) 16.86,21 16.81,21 arc(16.74,20.97) 16.71,20.9 arc(16.68,20.83) 16.61,20.8 15.8,20.8 15.24,20.24 v1(15.24,19.44)
CDC_MOSI: length 15.8
  TOP w0.127: 23.52,21 U1.23 ; 23.52,21 23.52,20.12 23.1,19.7 22.79,19.7 arc(22.7,19.66) 22.66,19.57 22.66,19.43 arc(22.54,19.3) 22.41,19.43 22.41,19.57 arc(22.28,19.7) 22.16,19.57 22.16,19.43 arc(22.03,19.3) 21.9,19.43 21.9,19.57 arc(21.77,19.7) 21.65,19.57 21.65,19.43 arc(21.52,19.3) 21.39,19.43 21.39,19.57 arc(21.36,19.66) 21.27,19.7 17.66,19.7 17.24,19.27 U2.19 ; 23.52,21 23.55,21.03 TP8.1
CDC_NSS: length 15.3
  TOP w0.127: U1.20 22.02,23.42 21.7,23.1 19.29,23.1 arc(19.2,23.06) 19.16,22.97 19.16,22.73 arc(19.03,22.6) 18.91,22.73 18.91,22.97 arc(18.78,23.1) 18.65,22.97 18.65,22.73 arc(18.52,22.6) 18.4,22.73 18.4,22.97 arc(18.27,23.1) 18.14,22.97 18.14,22.73 arc(18.02,22.6) 17.89,22.73 17.89,22.97 arc(17.76,23.1) 17.63,22.97 17.63,22.73 arc(17.51,22.6) 17.38,22.73 17.38,22.97 arc(17.34,23.06) 17.25,23.1 17,23.1 16.55,22.65 TP4.1 16.55,20.14 15.74,19.32 U2.22
DTR: length 2
  TOP w0.127: R26.1 43.15,15.79 43.12,15.76 U3.13
IIC_EN: length 26.4
  TOP w0.127: U2.24 14.74,18.62 14.7,18.66 v1(14.7,19) ; v1(32.35,22.95) 33.35,21.94 TP11.1 ; v1(25.53,23.51) 25.52,23.52 U1.27
  GND w0.127: v1(14.7,19) 14.7,22.4 15.81,23.51 v1(25.53,23.51) 26.09,22.95 v1(32.35,22.95)
INTN: length 23.4
  TOP w0.127: v1(16.72,19.1) 16.72,18.68 16.73,18.66 16.73,18.62 16.74,18.62 U2.20 ; v1(24,19.8) 26.3,19.8 ; 26.3,19.8 26.9,19.2 30,19.2 30.55,19.75 TP10.1 ; 26.3,19.8 26.3,21.8 26.07,22.03 24.97,22.03 24.52,22.48 U1.25
  GND w0.127: v1(16.72,19.1) 17.42,19.8 v1(24,19.8)
IO1: length 12.4
  TOP w0.127: U1.50 27.52,39.32 28.5,40.3 29.3,40.3 30.3,41.3 30.3,45.41 J21.1
IO2: length 9.9
  TOP w0.127: U1.51 27.02,39.15 28.41,40.53 29.21,40.53 30.07,41.39 30.07,43.1 J21.2
IO3: length 6.1
  TOP w0.127: J21.3 26.52,39.41 U1.52
IO4: length 5.2
  TOP w0.127: J21.4 26.33,40.77 26.02,40.46 U1.53
IO5: length 8.8
  TOP w0.127: J21.5 25.2,43.17 25.2,41.1 23.52,39.42 U1.58
IO6: length 11.5
  TOP w0.127: J21.6 24.97,45.48 24.97,41.2 23.02,39.25 U1.59
OSC32_IN: length 3.3
  TOP w0.127: U1.3 16.06,33.46 15.36,34.16 C13.2
OSC_CDC_IN: length 6.4
  TOP w0.127: TP16.1 22.8,12.98 22.12,12.3 21.2,12.3 20.94,12.56 C38.2 ; R21.1 U2.11
OSC_IN: length 6
  TOP w0.127: 15.4,31.6 15.4,31.6 13.8,31.6 13.71,31.51 TP5.1 12.66,31.51 ; U1.5 17.67,32.46 16.93,33.2 16.1,33.2 15.6,32.7
PA1: length 16
  TOP w0.127: R35.2 v1(14.07,20.33) ; U1.15 v1(16.84,27.46)
  GND w0.127: v1(16.84,27.46) 14.07,24.7 v1(14.07,20.33)
  BOTTOM w0.127: v1(16.84,27.46) 15.5,26.12 15.5,24.92 13.89,23.31
PA2: length 7.7
  TOP w0.127: U1.16 17.33,26.96 14.87,24.5 14.03,24.5 13.6,24.07 13.6,23.55 14.07,23.07 R36.2
PA3: length 6.8
  TOP w0.127: R37.2 19.25,23.83 20.18,24.76 U1.17
PC1: length 37.6
  TOP w0.127: v1(4.3,45.1) 3.44,45.1 J1.1 ; U2.28 v1(11.93,15.63)
  GND w0.127: v1(11.93,15.63) 10.57,15.63 10,16.2 10,27.6 7.3,30.3 7.3,44.2 6.4,45.1 v1(4.3,45.1)
PC2: length 31.9
  TOP w0.127: J2.1 3.44,38.9 v1(4.3,38.9) ; U2.29 v1(12.6,15.13)
  GND w0.127: v1(4.3,38.9) 5.6,38.9 6.3,38.2 6.3,29.6 9,26.9 9,15.9 9.77,15.13 v1(12.6,15.13)
PC3: length 26.1
  TOP w0.127: v1(4.3,32.7) 3.44,32.7 J3.1 ; U2.30 v1(11.9,14.63)
  GND w0.127: v1(11.9,14.63) 8.97,14.63 8,15.6 8,26.3 5.3,29 5.3,32.1 4.7,32.7 v1(4.3,32.7)
PC4: length 21.8
  TOP w0.127: v1(4.4,26.5) 3.98,26.5 3.93,26.55 J4.1 ; U2.31 v1(12.57,14.13)
  GND w0.127: v1(12.57,14.13) 8.17,14.13 7,15.3 7,25.67 6.17,26.5 v1(4.4,26.5)
PC5: length 16.2
  TOP w0.127: v1(4.3,20.3) 3.44,20.3 J5.1 ; U2.32 v1(11.93,13.63)
  GND w0.127: v1(11.93,13.63) 7.27,13.63 6,14.9 6,19.77 5.47,20.3 v1(4.3,20.3)
PC6: length 14.5
  TOP w0.127: v1(4.3,14.1) 3.44,14.1 J6.1 ; U2.3 v1(15.74,11.94)
  GND w0.127: v1(15.74,11.94) 15.3,11.5 7.9,11.5 5.3,14.1 v1(4.3,14.1)
PC7: length 15.6
  TOP w0.127: v1(4.3,8) 3.44,8 J7.1 ; U2.4 v1(16.24,11.6)
  GND w0.127: v1(4.3,8) 5.3,8 7.8,10.5 15.14,10.5 v1(16.24,11.6)
PG3: length 34.6
  TOP w0.127: TP9.1 v1(27.75,19.97) ; v1(14.3,8.3) 13.9,8.7 13.9,11.6 14.2,11.9 14.5,11.9 14.74,12.14 U2.1 ; v1(24.02,22.3) U1.24
  GND w0.127: v1(27.75,19.97) 27.38,19.6 24.8,19.6 ; v1(14.3,8.3) 17.2,8.3 17.58,8.68 21.68,8.68 22.1,9.1 22.1,10.2 24.8,12.9 24.8,19.6 ; 24.8,19.6 24.8,21.52 v1(24.02,22.3)
RESET: length 69.6
  TOP w0.127: R23.2 39.26,20.76 v1(40.15,21.65) ; S1.2 21.22,41.38 v1(21.8,40.8) ; D1.2 C1.2 16.97,31.46 U1.7 v1(20.26,31.46) ; R4.2 13.92,33.11 13.93,33.12 14.27,33.12 14.28,33.11 v1(15.1,33.11)
  GND w0.127: v1(15.1,33.11) 16.75,31.46 v1(20.26,31.46) 21.8,33 v1(21.8,40.8)
  BOTTOM w0.127: J20.1 51.74,30.3 39.7,30.3 ; v1(40.15,21.65) 39.7,22.1 39.7,30.3 ; 39.7,30.3 38.89,31.11 20.61,31.11 v1(20.26,31.46)
RTS: length 5.3
  TOP w0.127: U3.14 41.85,18.68 41.98,18.81 42.15,18.81 Q1.2
RX: length 34.9
  TOP w0.127: v1(35.15,16) 35.15,16.37 34.9,16.62 34.9,30.6 33.66,31.84 31.34,31.84 31.22,31.96 U1.43 ; v1(40.85,11.6) 40.85,10.3 40.58,10.02 U3.2
  GND w0.127: v1(40.85,11.6) 41.05,11.79 41.05,15.95 40.1,16.9 35.05,16.9 34.93,16.77 34.93,16.59 35.15,16.37 v1(35.15,16)
SWCLK: length 48.6
  TOP w0.127: v1(30.9,41.9) 31.35,41.45 31.35,39.55 30.51,38.72 TP1.1 29.71,38.27 R2.2 28.02,38.03 U1.49
  GND w0.127: v1(30.9,41.9) 37.3,48.3 53.2,48.3 55.9,45.6 55.9,37 J20.2
SWDIO: length 43
  TOP w0.127: U1.46 31.29,33.46 31.59,33.76 R7.2 33.31,33.76 33.97,34.42 TP2.1 32.62,35.31 31.8,36.13 v1(31.8,41.4)
  GND w0.127: v1(31.8,41.4) 37.8,47.4 50.5,47.4 51.8,46.1 51.8,41.39 J20.4
TX: length 35.5
  TOP w0.127: U3.3 41.85,10.02 41.6,10.27 v1(41.6,11.6) ; U1.42 31.22,31.46 31.34,31.59 33.56,31.59 34.65,30.49 34.65,16.62 34.4,16.37 v1(34.4,16)
  GND w0.127: v1(41.6,11.6) 41.51,11.6 41.3,11.81 41.3,16.06 40.21,17.15 34.95,17.15 34.67,16.88 34.67,16.64 34.4,16.37 v1(34.4,16)
USB_DM: length 2
  TOP w0.127: U1.44 31.93,32.46 L6.4
USB_DP: length 1.9
  TOP w0.127: L6.3 32,32.96 U1.45
USB_ID: length 37.8
  TOP w0.127: U1.26 v1(25.02,23) ; J16.4 54.87,22.72 54.85,22.7 v1(54.1,22.7) 54.1,24.7 53.64,25.16 TP23.1 ; v1(40.9,23.8) v1(37,23.8)
  GND w0.127: v1(37,23.8) 35.7,22.5 25.52,22.5 v1(25.02,23) ; v1(40.9,23.8) 44.3,23.8 45.4,22.7 v1(54.1,22.7)
USB_SH: length 2.9
  TOP w0.5: L5.1 50.54,15.33 51.02,14.86 J15.9
N02715: length 1.3
  TOP w0.127: U1.47 v1(28.94,33.96)
N29089: length 1.4
  TOP w0.127: Y1.3 15.31,30.19 14.85,30.65 14.85,30.73 14.51,31.06 R12.2
N51136: length 34.8
  TOP w0.127: 52.4,21.9 49.7,21.9 49.5,22.1 49.5,23.84 49.14,24.2 46.46,24.2 ; 52.4,21.9 55.81,21.9 J16.3 ; 52.4,21.9 TP22.1 ; 39.2,32.8 39.22,32.82 C49.2 ; 39.2,32.8 41,32.8 41.8,32 41.8,24.8 42.4,24.2 46.46,24.2 ; 39.2,32.8 38.3,32.8 ; L6.2 34.53,33.08 34.81,32.8 38.3,32.8 ; 46.46,24.2 U5.3 ; R32.2 38.28,32.82 38.3,32.8
N51143: length 35.9
  TOP w0.127: 55.98,21.42 55.8,21.6 52.4,21.6 ; 49.08,23.94 49.07,23.95 42.29,23.95 41.55,24.69 41.55,31.9 40.89,32.55 39.2,32.55 ; 49.08,23.94 49.27,23.75 49.27,21.93 49.6,21.6 52.4,21.6 ; 49.08,23.94 47.59,23.94 47.46,23.81 U5.5 ; L6.1 34.53,32.28 34.81,32.55 39.2,32.55 ; 39.2,32.55 39.22,32.53 C50.2 ; 52.4,21.6 TP21.1
N60341: length 2.1
  TOP w0.127: U6.3 39.65,40.87 38.97,40.19 C54.1
N60528: length 4.5
  TOP w0.127: TP24.1 44.87,38.29 C52.1 44.87,39.51 44.53,39.85 44.53,39.88 44.04,40.37 U6.5 ; U6.6 44.39,40.87 44.87,40.4 C51.1
N60691: length 3.4
  TOP w0.127: C58.2 40.91,43.04 40.69,42.83 U6.1 ; C59.2 40.91,45.69 TP26.1
N73371: length 4.6
  TOP w0.127: U7.5 33.36,8.64 33.75,8.25 33.75,7.9 C63.1 34.18,6.69 TP29.1 ; U7.6 33.43,9.14 33.76,8.8 C62.1
N73413: length 2.2
  TOP w0.127: C64.1 28.18,8.37 28.95,9.14 U7.3
N73497: length 3.7
  TOP w0.127: C70.2 30.05,12.75 30.76,13.45 TP32.1 ; C69.2 30.05,11.31 30.01,11.26 U7.1
N79731: length 1.4
  TOP w0.127: U2.2 15.24,11.44 15.2,11.4
N460116: length 3.4
  TOP w0.127: R38.2 46.25,40.68 45.92,41 44.76,41 44.38,41.37 U6.7
N460149: length 2.3
  TOP w0.127: TP28.1 43.07,42.84 43.69,42.21 U6.8
N460345: length 3.4
  TOP w0.127: U7.7 33.7,9.64 33.83,9.5 35.2,9.5 35.56,9.14 R41.2
N460349: length 4.5
  TOP w0.127: TP33.1 33.43,13.33 33,12.9 33,10.48 33.01,10.48 U7.8
N521157: length 2
  TOP w0.127: D4.1 49.75,19.28 49.83,19.19 F1.2
N584999: length 1.1
  TOP w0.127: U1.31 v1(27.52,23.62)
N596448: length 11
  TOP w0.127: U1.39 29.24,29.96 ; 29.24,27.46 U1.34 31.94,27.46 31.95,27.47 R9.2 ; U1.33 29.24,26.96 ; U1.37 29.24,28.96 ; U1.36 29.24,28.46 ; U1.40 29.24,30.46 ; U1.41 29.24,30.96 ; U1.35 29.24,27.96 ; U1.38 29.24,29.46
N899054: length 21.5
  TOP w0.127: U1.8 19.36,30.96 ; R6.2 11.41,31.11 11.5,31.02 v1(11.5,30.6) ; 19.5,30.1 v1(20.3,30.1) 20.95,30.75 20.95,33.35 20.34,33.96 U1.2 ; U1.10 19.36,29.96 ; U1.11 19.36,29.46 ; U1.9 19.36,30.46
  BOTTOM w0.127: v1(20.3,30.1) 19.8,30.6 v1(11.5,30.6)
N902106: length 5.6
  TOP w0.127: U1.14 16.66,27.96 14.3,25.6 14.3,25.43 14.01,25.15 R8.2
N916741: length 9.7
  TOP w0.127: U1.62 21.52,35.32 ; U1.54 25.52,35.32 ; 24.52,35.32 U1.56 24.52,37.65 24.51,37.67 R1.2 ; U1.61 22.02,35.32 ; U1.57 24.02,35.32 ; U1.55 25.02,35.32
N919223: length 4.9
  TOP w0.127: U2.13 19.41,15.63 20.38,16.6 21.89,16.6 23.03,17.73 R16.1
N919295: length 2.4
  TOP w0.127: U2.14 19.41,16.13 20.22,16.94 20.55,16.94 20.89,17.27 R19.1
N919351: length 2.8
  TOP w0.127: R17.1 20.89,18.42 20.2,17.73 20.2,17.41 19.41,16.63 U2.15
N919833: length 2.2
  TOP w0.127: U2.12 20.09,15.13 20.89,15.93 R18.1
N923492: length 2
  TOP w0.127: C35.2 19.3,12.14 19.04,12.4 U2.9
N1282544: length 9.9
  TOP w0.127: J15.3 49.63,9.93 49.5,10.06 49.5,10.68 49.22,10.95 45.17,10.95 44.9,10.68 44.9,10.28 44.77,10.15 44.52,10.15 44.39,10.02 U3.5
N1282560: length 10.1
  TOP w0.127: U3.6 45.66,10.02 45.53,10.15 45.28,10.15 45.15,10.28 45.15,10.57 45.28,10.7 49.12,10.7 49.25,10.57 49.25,9.29 49.41,9.13 J15.2
N1283256: length 3
  TOP w0.127: Y4.3 48.2,5.3 49.2,4.3 TP17.1
N1285259: length 2
  TOP w0.127: U3.8 48.92,8.58 49.5,8 R25.2
N1298012: length 1.5
  TOP w0.127: U4.1 38.19,22.41 38.4,22.2 R23.1
N1298019: length 3.4
  TOP w0.127: D3.1 39.01,22.3 38.84,22.47 U4.2
N1298582: length 3.6
  TOP w0.127: Q1.3 43.1,20.51 43.05,20.56 R22.1
N1298896: length 1.8
  TOP w0.127: Q2.2 36.91,18.3 36.85,18.36 R30.1
N1310957: length 2.1
  TOP w0.127: R33.2 44.34,29.13 44.36,29.11 J18.1
N1310961: length 5.1
  TOP w0.127: R34.1 46.55,27.77 J18.2
N1315376: length 1.2
  TOP w0.127: R35.1 12.64,21.24 12.46,21.41 D5.4
N1315380: length 1.2
  TOP w0.127: R36.1 12.64,22.54 12.46,22.36 D5.2
N1315384: length 1.4
  TOP w0.127: R37.1 12.69,23.83 D5.1
N1323457: length 2.3
  TOP w0.127: U2.27 12.49,16.13 11.89,16.73 C32.1
N1326027:
  vias: v1(0.5,48) v1(0.5,47.4) v1(0.5,46.8) v1(0.5,46.2) v1(0.5,45.6) v1(0.5,45) v1(0.5,44.4) v1(0.5,43.8) v1(0.5,43.2) v1(0.5,42.6) v1(0.5,42) v1(0.5,41.4) v1(0.5,40.8) v1(0.5,40.2) v1(0.5,39.6) v1(0.5,39) v1(0.5,38.4) v1(0.5,37.8) v1(0.5,37.2) v1(0.5,36.6) v1(0.5,36) v1(0.5,35.4) v1(0.5,34.8) v1(0.5,34.2) v1(0.5,33.6) v1(0.5,33) v1(0.5,32.4) v1(0.5,31.8) v1(0.5,31.2) v1(0.5,30.6) v1(0.5,30) v1(0.5,29.4) v1(0.5,28.8) v1(0.5,28.2) v1(0.5,27.6) v1(0.5,27) v1(0.5,26.4) v1(0.5,25.8) v1(0.5,25.2) v1(0.5,24.6) v1(0.5,24) v1(0.5,23.4) v1(0.5,22.8) v1(0.5,22.2) v1(0.5,21.6) v1(0.5,21) v1(0.5,20.4) v1(0.5,19.8) v1(0.5,19.2) v1(0.5,18.6) v1(0.5,18) v1(0.5,17.4) v1(0.5,16.8) v1(0.5,16.2) v1(0.5,15.6) v1(0.5,15) v1(0.5,14.4) v1(0.5,13.8) v1(0.5,13.2) v1(0.5,12.6) v1(0.5,12) v1(0.5,11.4) v1(0.5,10.8) v1(0.5,10.2) v1(0.5,9.6) v1(0.5,9) v1(0.5,8.4) v1(0.5,7.8) v1(0.5,7.2) v1(0.5,6.6) v1(0.5,6) v1(0.5,5.4) v1(0.5,4.8) v1(0.5,4.2) v1(0.5,3.6) v1(0.5,3) v1(0.5,2.4) v1(0.5,1.8) v1(0.7,48.7) v1(0.7,1.2) v1(1.1,49.2) v1(1.2,0.7) v1(1.7,49.4) v1(1.8,0.5) v1(2.3,49.5) v1(2.4,0.5) v1(2.9,49.5) v1(3,0.5) v1(3.5,49.5) v1(3.6,0.5) v1(4.1,49.5) v1(4.2,0.5) v1(4.7,49.5) v1(4.7,32) v1(4.7,31.3) v1(4.7,30.5) v1(4.7,28.9) v1(4.7,19.7) v1(4.7,14.7) v1(4.7,13.5) v1(4.8,45.7) v1(4.8,20.9) v1(4.8,7.4) v1(4.8,0.5) v1(4.9,39.5) v1(4.9,33.3) v1(4.9,25.9) v1(5.1,28.2) v1(5.2,38.3) v1(5.2,8.7) v1(5.3,49.5) v1(5.3,44.5) v1(5.3,27.1) v1(5.3,13.3) v1(5.4,19.5) v1(5.4,18.6) v1(5.4,17.7) v1(5.4,16.8) v1(5.4,15.9) v1(5.4,15) v1(5.4,0.5) v1(5.6,20.9) v1(5.7,45.7) v1(5.7,7.6) v1(5.8,39.4) v1(5.8,37.8) v1(5.8,36.9) v1(5.8,36) v1(5.8,35.1) v1(5.8,34.2) v1(5.8,33.3) v1(5.8,32.4) v1(5.8,31.5) v1(5.8,30.6) v1(5.8,29.7) v1(5.8,27.7) v1(5.8,25.9) v1(5.8,9.3) v1(5.9,49.5) v1(5.9,14.2) v1(5.9,12.7) v1(6,0.5) v1(6.2,44.5) v1(6.2,28.9) v1(6.4,27.1) v1(6.4,9.9) v1(6.4,8.3) v1(6.5,49.5) v1(6.5,25.4) v1(6.5,24.5) v1(6.5,23.6) v1(6.5,22.7) v1(6.5,21.8) v1(6.5,20.9) v1(6.5,20) v1(6.5,19.1) v1(6.5,18.2) v1(6.5,17.3) v1(6.5,16.4) v1(6.5,15.5) v1(6.5,13.6) v1(6.5,12.1) v1(6.6,0.5) v1(6.8,45.6) v1(6.8,43.7) v1(6.8,42.8) v1(6.8,41.9) v1(6.8,41) v1(6.8,40.1) v1(6.8,39.2) v1(6.8,38.3) v1(6.8,37.4) v1(6.8,36.5) v1(6.8,35.6) v1(6.8,34.7) v1(6.8,33.8) v1(6.8,32.9) v1(6.8,32) v1(6.8,31.1) v1(6.8,30.2) v1(6.8,28.3) v1(6.9,14.7) v1(7,26.5) v1(7,10.5) v1(7,8.9) v1(7.1,49.5) v1(7.1,11.5) v1(7.2,13) v1(7.2,0.5) v1(7.3,29.5) v1(7.4,27.7) v1(7.5,45) v1(7.5,25.9) v1(7.5,25) v1(7.5,24.1) v1(7.5,23.2) v1(7.5,22.3) v1(7.5,21.4) v1(7.5,20.5) v1(7.5,19.6) v1(7.5,18.7) v1(7.5,17.8) v1(7.5,16.9) v1(7.5,16) v1(7.6,9.5) v1(7.7,49.5) v1(7.8,15.1) v1(7.8,11) v1(7.8,0.5) v1(7.9,42.3) v1(7.9,41.4) v1(7.9,40.5) v1(7.9,39.6) v1(7.9,38.7) v1(7.9,37.8) v1(7.9,36.9) v1(7.9,36) v1(7.9,35.1) v1(7.9,34.2) v1(7.9,33.3) v1(7.9,32.4) v1(7.9,31.5) v1(7.9,30.6) v1(7.9,28.9) v1(8,27.1) v1(8,13) v1(8.3,49.5) v1(8.3,9.9) v1(8.4,30) v1(8.4,0.5) v1(8.5,28.3) v1(8.5,26.4) v1(8.5,25.5) v1(8.5,24.6) v1(8.5,23.7) v1(8.5,22.8) v1(8.5,21.9) v1(8.5,21) v1(8.5,20.1) v1(8.5,19.2) v1(8.5,18.3) v1(8.5,17.4) v1(8.5,16.5) v1(8.6,12.1) v1(8.6,11) v1(8.8,15.4) v1(8.8,13) v1(8.9,49.5) v1(9,29.4) v1(9,0.5) v1(9.1,27.7) v1(9.1,9.9) v1(9.4,12.1) v1(9.4,11) v1(9.5,49.5) v1(9.5,26.9) v1(9.5,26) v1(9.5,25.1) v1(9.5,24.2) v1(9.5,23.3) v1(9.5,22.4) v1(9.5,21.5) v1(9.5,20.6) v1(9.5,19.7) v1(9.5,18.8) v1(9.5,17.9) v1(9.5,17) v1(9.5,16.1) v1(9.6,28.8) v1(9.6,13) v1(9.6,0.5) v1(9.9,9.9) v1(10.1,49.5) v1(10.2,28.2) v1(10.2,12.1) v1(10.2,11) v1(10.2,0.5) v1(10.4,13) v1(10.6,27.4) v1(10.6,26.5) v1(10.6,25.6) v1(10.6,24.7) v1(10.6,23.8) v1(10.6,22.9) v1(10.6,22) v1(10.6,21.1) v1(10.6,20.2) v1(10.6,19.3) v1(10.6,18.4) v1(10.6,17.5) v1(10.6,16.6) v1(10.7,49.5) v1(10.7,9.9) v1(10.8,0.5) v1(11,12.1) v1(11,11) v1(11.2,13) v1(11.3,49.5) v1(11.4,0.5) v1(11.5,9.9) v1(11.8,12.1) v1(11.8,11) v1(11.9,49.5) v1(12,0.5) v1(12.3,9.9) v1(12.5,49.5) v1(12.6,13) v1(12.6,12.1) v1(12.6,11) v1(12.6,0.5) v1(13.1,49.5) v1(13.1,9.9) v1(13.2,0.5) v1(13.7,49.5) v1(13.8,0.5) v1(14.3,49.5) v1(14.4,0.5) v1(14.9,49.5) v1(15,0.5) v1(15.5,49.5) v1(15.6,0.5) v1(16.1,49.5) v1(16.2,0.5)
N1367719: length 7.5
  TOP w0.127: R3.2 18.64,38.01 18.6,37.97 v1(18.6,37.5) ; U1.4 v1(19.64,32.96)
  BOTTOM w0.127: v1(19.64,32.96) 20,33.32 20,34.8 18.6,36.2 v1(18.6,37.5)
N1367723: length 10.2
  TOP w0.127: R5.2 11.06,31.96 v1(11.5,31.96) ; U1.6 v1(19.64,31.96)
  BOTTOM w0.127: v1(19.64,31.96) v1(11.5,31.96)

## Copper pours and planes (outline as drawn; the poured copper is in the pictures)
3V on TOP: 24.2,15.2 29,15.2 29.2,15 29.2,14.2 29,14 24.2,14 24,14.2 24,15
3V on TOP: 30.5,9.9 29.3,9.9 28.9,10.3 22.5,10.3 22.3,10.1 22.3,7.9 22.5,7.7 26.7,7.7 26.9,7.9 26.9,9.2 27.1,9.4 30.5,9.4
3V on BOTTOM: 19,17.5 19,19.6 18.8,19.8 17.4,19.8 17.2,19.6 17.2,18.8 17.4,18.6 18.1,18.6 18.3,18.4 18.3,17.5 18.5,17.3 18.8,17.3
3V on POWER: 17.1,20.6 17.1,1 35.2,1 35.2,20.6 ; 1 cut-out
3V3 on TOP: 41.2,41.6 41.2,41.2 39.6,41.2 39.1,40.7 35.5,40.7 35.3,40.5 35.3,39.3 35.1,39.1 32.5,39.1 32.3,39.3 32.3,42.2 32.5,42.4 35.5,42.4 35.5,41.9 35.7,41.7 39.5,41.7 39.6,41.6
3V3 on TOP: 13,38.7 14.4,38.7 14.6,38.5 14.6,36.5 14.4,36.3 13,36.3 12.8,36.5 12.8,38.5
3V3 on TOP: 38.7,28.4 38.7,24.7 38.5,24.5 37.2,24.5 37,24.7 37,28.4 37.2,28.6 38.5,28.6
3V3 on BOTTOM: 14.9,28.8 17.4,28.8 17.6,28.6 17.6,28.3 17.4,28.1 15.6,28.1 15.4,27.9 15.4,27.4 15.2,27.2 14.9,27.2 14.7,27.4 14.7,28.6
3V3 on BOTTOM: 29.8,34.4 30,34.2 31.6,34.2 31.8,34.4 31.8,35 31.6,35.2 30.8,35.2 30.6,35.4 30.6,40.9 30.4,41.1 30,41.1 29.8,40.9
3V3 on BOTTOM: 19.8,43.8 19.8,37.2 20,37 20.4,37 20.6,37.2 20.6,43.8 20.4,44 20,44
3V3 on BOTTOM: 21.3,30.8 21.3,24.1 21.5,23.9 21.9,23.9 22.1,24.1 22.1,30 22.3,30.2 23.4,30.2 23.6,30.4 23.6,30.8 23.4,31 21.5,31
3V3 on BOTTOM: 27.9,26.4 27.7,26.2 27.7,24.6 27.9,24.4 34,24.4 34.2,24.6 34.2,26.2 34,26.4 33,26.4 32.8,26.2 32.8,25.4 32.6,25.2 28.8,25.2 28.8,26.2 28.6,26.4
3V3 on POWER: 17.2,49 46.4,49 46.4,31.3 46,30.9 36.1,30.9 35.2,30 35.2,21.3 12.1,21.3 11.7,21.7 11.7,37.9 17.2,41.4 ; 5 cut-outs
5V on TOP: 37.1,15.4 37.1,14 37.3,13.8 38.3,13.8 38.5,14 38.5,15.4 38.3,15.6 37.3,15.6
5V on TOP: 48.4,43.3 48.4,40.1 48.6,39.9 50.5,39.9 50.7,40.1 50.7,43.3 50.5,43.5 48.6,43.5
5V on TOP: 42.2,6.1 45.5,6.1 45.7,5.9 45.7,5 45.5,4.8 44.1,4.8 43.8,5.1 42.2,5.1 42,5.3 42,5.9
5V on TOP: 36.4,11.1 36.4,13.2 36.6,13.4 37.8,13.4 38,13.2 38,11.1 37.8,10.9 36.6,10.9
5V on TOP: 44.9,22.8 48.2,22.8 48.4,22.6 48.4,16.4 48.3,16.3 47.8,16.3 47.7,16.4 47.7,20.8 47.5,21 44.9,21 44.7,21.2 44.7,22.6
5V on POWER: 58,49 58.71,48.71 59,48 59,27.6 49.6,27.6 48.7,26.7 48.7,1 35.9,1 35.9,29.7 36.4,30.2 46.5,30.2 47.1,30.8 47.1,49
5V_USB on TOP: 51.3,19.4 53.5,19.4 53.7,19.6 53.7,21.1 53.9,21.3 54.7,21.3 54.9,21.1 54.9,17.9 54.7,17.7 51.3,17.7 51.1,17.9 51.1,19.2
5V_USB on TOP: 50.5,8.7 52.7,8.7 52.9,8.5 52.9,6.7 52.7,6.5 50.5,6.5 50.3,6.7 50.3,8.5
5V_USB on POWER: 49.7,26.9 59,26.9 59,2 58.71,1.29 58,1 49.4,1 49.4,26.6
AGND on BOTTOM: 14.9,29.6 17.5,29.6 17.7,29.4 17.7,29.1 17.5,28.9 14.9,28.9 14.7,29.1 14.7,29.4
AGND on GND: 0.25,48 0.77,49.23 2,49.75 16.5,49.8 16.5,41.8 11,38.3 11,21 11.4,20.6 12.9,20.6 13.4,20.1 13.4,12.7 13.8,12.3 16.7,12.3 16.7,0.25 2,0.25 0.77,0.77 0.25,2 ; 6 cut-outs
DGND on BOTTOM: 28.3,24.1 28.3,21.5 28.5,21.3 28.8,21.3 29,21.5 29,23.2 29.2,23.4 33.2,23.4 33.4,23.6 33.4,24.1 33.2,24.3 28.5,24.3
DGND on BOTTOM: 19.8,17.8 19.8,19.6 19.6,19.8 19.3,19.8 19.1,19.6 19.1,17.8 19.3,17.6 19.6,17.6
DGND on BOTTOM: 16.9,41.6 16.9,49.9 31.9,49.9 31.9,39.5 32.5,38.9 33.7,38.9 34.9,37.7 34.9,36.9 35.7,36.1 37.7,36.1 38.2,35.6 38.2,30.6 39,29.8 43.4,29.8 43.7,29.5 43.7,20.5 42.7,19.5 35.3,19.5 28.8,13 24.7,13 22,10.3 22,9.2 21.7,8.9 17.6,8.9 17.1,9.4 17.1,10.1 14.2,10.1 13.8,10.6 13.8,20.3 13.1,21 11.6,21 11.4,21.2 11.4,38.1 ; 2 cut-outs
DGND on BOTTOM: 29.1,40.3 29.5,40.3 29.7,40.1 29.7,34.8 29.4,34.5 25.9,34.5 25.6,34.8 25.6,35.4 25.9,35.7 28.9,35.7 28.9,40.1
DGND on BOTTOM: 21.2,30.8 21.2,26.5 21,26.3 20.7,26.3 20.5,26.5 20.5,30.8 20.7,31 21,31
DGND on BOTTOM: 20.9,42.4 22.1,42.4 22.3,42.2 22.3,41.8 22.1,41.6 21.5,41.6 21.5,38.3 21.3,38.1 20.9,38.1 20.7,38.3 20.7,42.2
DGND on GND: 16.9,49.8 31.9,49.8 31.9,39.5 32.5,38.9 33.7,38.9 34.9,37.7 34.9,36.9 35.7,36.1 37.7,36.1 38.2,35.6 38.2,30.6 39,29.8 43.4,29.8 43.7,29.5 43.7,20.5 42.7,19.5 35.3,19.5 28.8,13 24.7,13 22,10.3 22,9.2 21.7,8.9 17.6,8.9 17.1,9.4 17.1,12.7 14,12.7 13.8,12.9 13.8,20.3 13.1,21 11.6,21 11.4,21.2 11.4,38.1 16.9,41.6 ; 1 cut-out
PGND on TOP: 38.4,40.4 38.4,36.8 38.2,36.6 36,36.6 35.4,37.2 35.4,38.8 35.6,39 37.4,39 37.7,39.3 37.7,40.4 37.9,40.6 38.2,40.6
PGND on TOP: 45.5,20.7 45.5,17.8 45.7,17.6 47.2,17.6 47.4,17.8 47.4,20.7 47.2,20.9 45.7,20.9
PGND on TOP: 33.7,11 36.1,11 36.3,11.2 36.3,13.3 36.1,13.5 34.9,13.5 34.7,13.3 34.7,12 34.5,11.8 33.7,11.8 33.5,11.6 33.5,11.2
PGND on TOP: 30.6,12.9 30.6,11.4 30.8,11.2 31.2,11.2 31.4,11.4 31.4,12.1 31.6,12.3 32.2,12.3 32.4,12.5 32.4,12.9 32.2,13.1 30.8,13.1
PGND on TOP: 24.9,10.5 27.8,10.5 28.7,11.4 29.2,11.4 29.4,11.6 29.4,12.2 29.2,12.4 27,12.4 26.8,12.2 26.8,11.4 26.6,11.2 24.9,11.2 24.7,11 24.7,10.7
PGND on TOP: 27.6,8.7 27.6,5.4 27.4,5.2 24.4,5.2 24.2,5.4 24.2,7.3 24.4,7.5 26.8,7.5 27.1,7.8 27.1,8.7
PGND on TOP: 44.5,42.4 46.9,42.4 47.1,42.6 47.1,44.7 46.9,44.9 45.7,44.9 45.5,44.7 45.5,43.4 45.3,43.2 44.5,43.2 44.3,43 44.3,42.6
PGND on TOP: 35.8,41.8 39.5,41.8 40.4,42.7 40.4,44.7 40.2,44.9 37.8,44.9 37.6,44.7 37.6,42.7 37.4,42.5 35.8,42.5 35.6,42.3 35.6,42
PGND on BOTTOM: 32.3,49.9 32.3,41.3 32.8,40.8 34.7,40.8 35.3,40.2 35.3,37.1 35.9,36.5 37.7,36.5 38.6,35.6 38.6,30.7 39.1,30.2 43.6,30.2 44.1,29.7 44.1,20.3 42.9,19.1 35.5,19.1 29,12.6 24.9,12.6 22.4,10.1 22.4,9.1 21.8,8.5 17.6,8.5 17.1,8 17.1,0.1 59.8,0.1 59.9,49.9
PGND on GND: 32.3,49.75 58,49.75 59.23,49.23 59.75,48 59.75,2 59.23,0.77 58,0.25 17.1,0.2 17.1,8 17.6,8.5 21.8,8.5 22.4,9.1 22.4,10.1 24.9,12.6 29,12.6 35.5,19.1 42.9,19.1 44.1,20.3 44.1,29.7 43.6,30.2 39.1,30.2 38.6,30.7 38.6,35.6 39.5,36.5 35.9,36.5 35.3,37.1 35.3,40.2 35.9,40.8 32.8,40.8 32.3,41.3 32.3,42.2 32.9,42.2 32.3,42.8
OSC32_IN on TOP: 15.3,37.7 17.3,37.7 17.6,37.4 17.6,35.8 16.7,34.9 16.7,33.7 16.4,33.4 15.3,33.4 15,33.7 15,37.4
OSC_CDC_IN on TOP: 20.6,15.2 21.1,15.2 21.3,15 21.3,13.3 21.1,13.1 20.6,13.1 20.4,13.3 20.4,15
OSC_IN on TOP: 15,32.5 15,30.9 15.3,30.6 15.8,30.6 16.1,30.9 16.1,32.5 15.8,32.8 15.3,32.8
RTS on TOP: 41,20.1 42.7,20.1 42.9,19.9 42.9,18.8 42.7,18.6 41,18.6 40.8,18.8 40.8,19.9
USB_SH on TOP: 54.9,27 59.75,27 59.75,2.7 51.3,2.7 50.9,3.1 50.9,6 51.2,6.3 52.8,6.3 53.1,6.7 53.1,13.1 52.8,13.4 51.2,13.4 50.9,13.7 50.9,17.3 51.1,17.5 54.7,17.5 55.1,17.9 55.1,19.3 55.4,19.6 57,19.6 57.3,19.9 57.3,24.3 57,24.6 54.9,24.6 54.6,24.9 54.6,26.7
N02715 on BOTTOM: 25.9,34.4 29.1,34.4 29.4,34.1 29.4,33.5 29.1,33.2 25.9,33.2 25.6,33.5 25.6,34.1
N26347 on TOP: 12.9,36 14.6,36 14.8,35.8 14.8,35 14.6,34.8 12.9,34.8 12.7,35 12.7,35.8
N60341 on TOP: 38.8,37.2 43.5,37.2 43.7,37.4 43.7,38.9 43.4,39.2 39.9,39.2 39.7,39.4 39.7,40.3 39.5,40.5 38.8,40.5 38.6,40.3 38.6,37.4
N60528 on TOP: 45.1,40.7 45.3,40.5 45.3,39.2 45.1,39 44.6,39 44.4,39.2 44.4,40.5 44.6,40.7
N60691 on TOP: 41.4,44.7 41.4,43.2 41.2,43 40.8,43 40.6,43.2 40.6,44.7 40.8,44.9 41.2,44.9
N73371 on TOP: 33.9,9.3 34.4,9.3 34.6,9.1 34.6,7.6 34.4,7.4 33.9,7.4 33.7,7.6 33.7,9.1
N73413 on TOP: 27.8,8.8 27.8,5.4 28,5.2 32.8,5.2 33,5.4 33,7.3 32.7,7.6 28.9,7.6 28.7,7.8 28.7,8.8 28.5,9 28,9
N73497 on TOP: 30.4,11.3 30.4,12.9 30.2,13.1 29.8,13.1 29.6,12.9 29.6,11.3 29.8,11.1 30.2,11.1
N79129 on TOP: 21.5,15.2 23.4,15.2 23.6,15 23.6,14.3 23.4,14.1 21.5,14.1 21.3,14.3 21.3,15
N79731 on TOP: 15.1,11.5 15.8,11.5 16.6,10.7 16.6,10.1 16.3,9.8 15.1,9.8 14.8,10.1 14.8,11.2
N460149 on TOP: 43.2,42.2 48.1,42.2 48.3,42 48.3,40.4 48.1,40.2 47.4,40.2 47.2,40.4 47.2,41.1 47,41.3 45.3,41.3 45,41.6 43.2,41.6
N460349 on TOP: 33.7,10.8 37.4,10.8 37.6,10.6 37.6,8.8 37.4,8.6 36.8,8.6 36.6,8.8 36.6,9.5 36.4,9.7 33.9,9.7 33.7,9.9 32.5,9.9 32.5,10.6 33.5,10.6
